# Altium PCB Lora_Eval_Module.PcbDoc
Units mil, origin at the board's own origin, x right, y up, seen from the top; angles counter-clockwise.
Board outline 1180.05 x 1532.38 mil, 2 copper layers (Top Layer, Bottom Layer); 7 components, 15 nets, 49 pads, 74 vias.
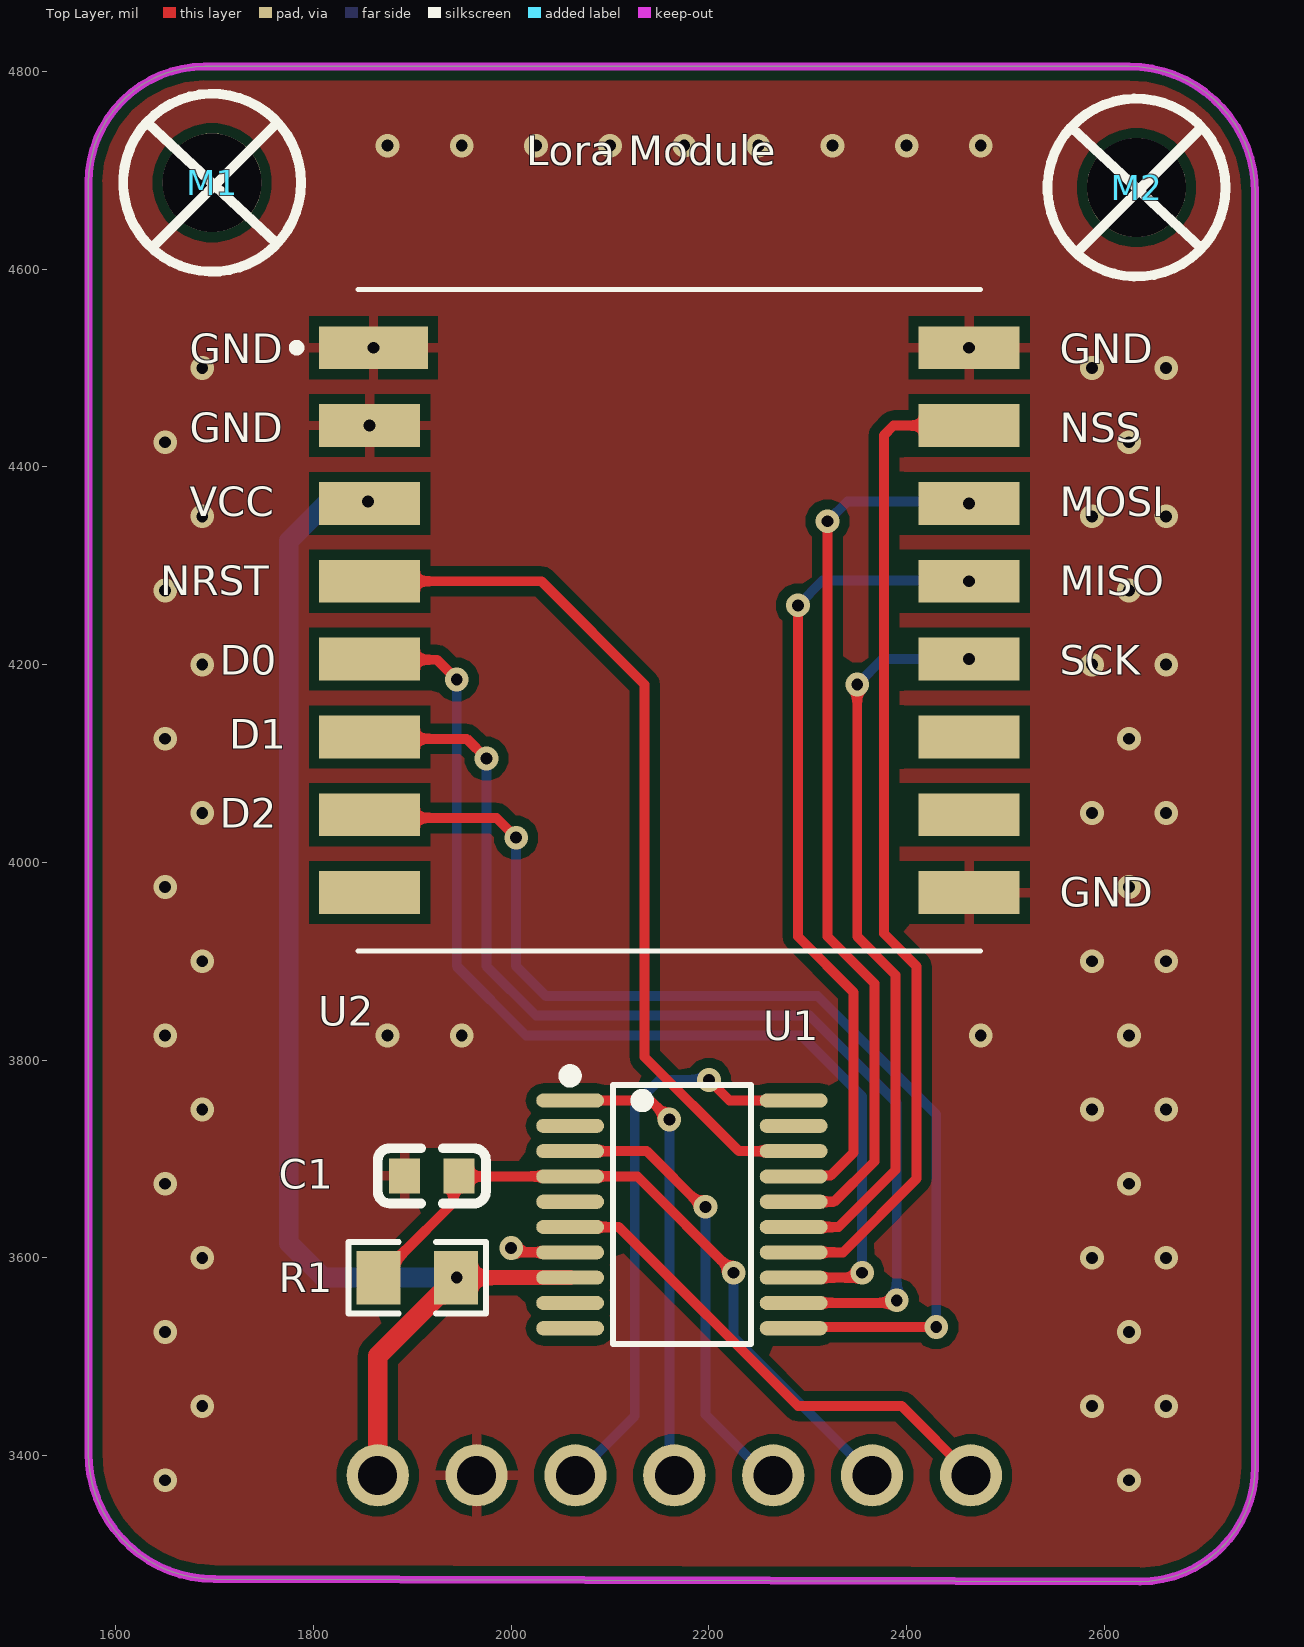
[diagram p0: Top Layer view]
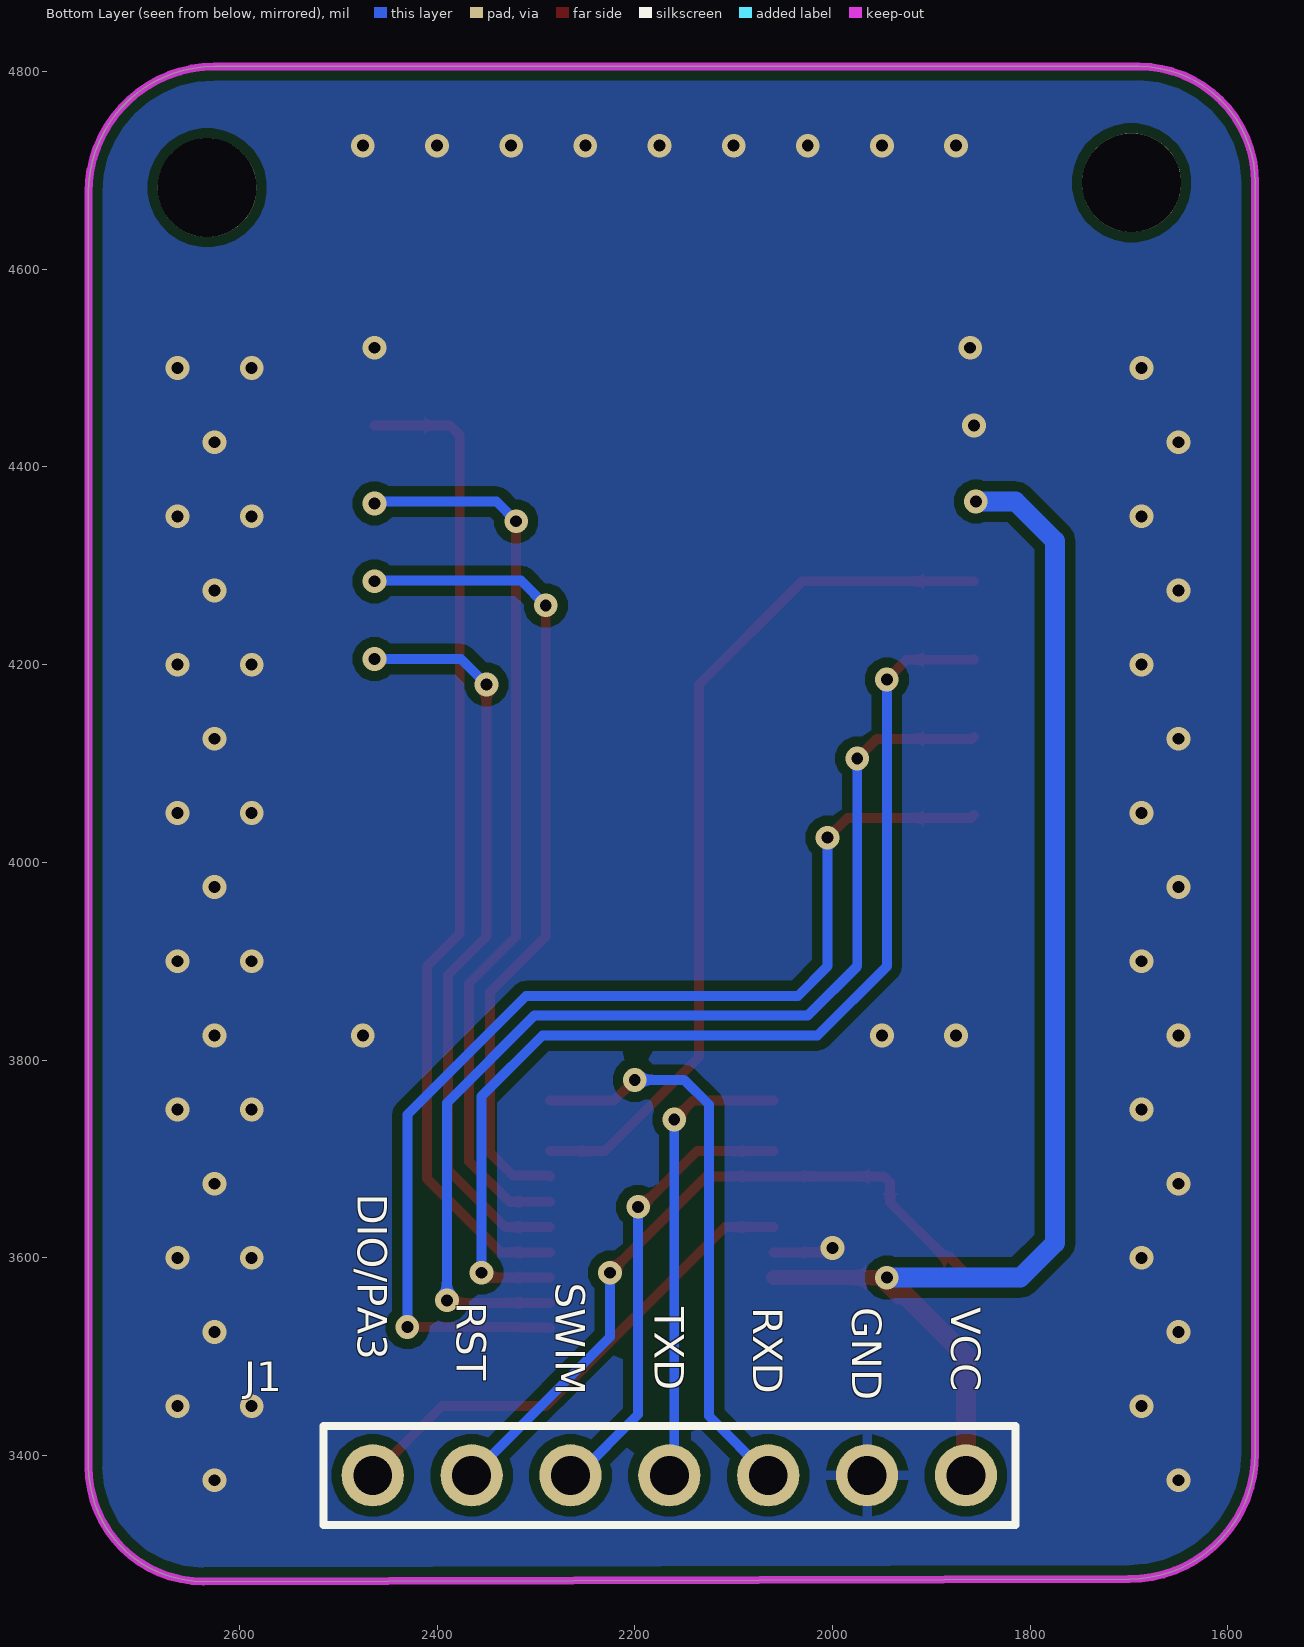
[diagram p1: Bottom Layer view, seen from below]
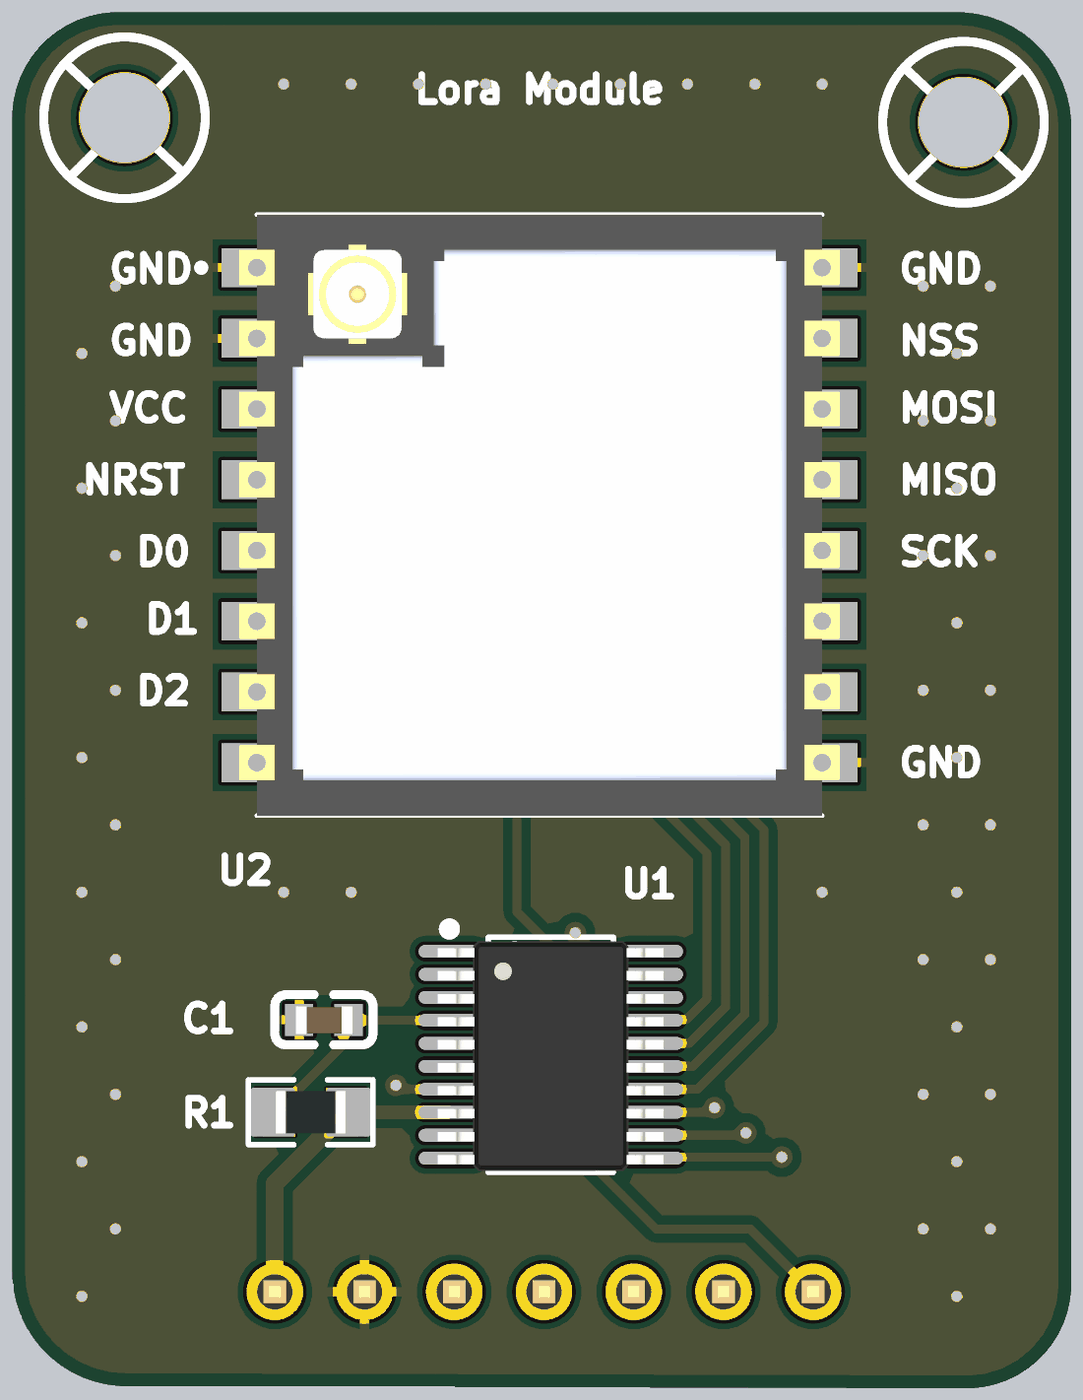
[diagram p2: 3D render of the assembled board from above, using the file's embedded part models]

## Layer stack, top to bottom
Top Solder: solder mask 0.4, Solder Resist, Dk 3.5
Top Layer: signal copper 1.4
Dielectric 1: dielectric 12.6, FR-4, Dk 4.8
Bottom Layer: signal copper 1.4
Bottom Solder: solder mask 0.4, Solder Resist, Dk 3.5

## Board outline
1700.01,3275 cw(c1700.01,3402.53) 1572.48,3402.53 1572.48,4687.5 cw(c1690,4687.5) 1690,4805.03 2625,4805.03 cw(c2625,4677.5) 2752.52,4677.5 2752.52,3389.12 cw(c2636.05,3389.12) 2636.05,3272.65

## Design rules (kind name [scope] priority, off if disabled: settings)
Clearance [All] p1: gap=10 ignorepadtopadclearanceinfootprint=FALSE except(0: Arc-Hole Track-Hole SMDPad-Hole THPad-Hole Via-Hole Fill-Hole Poly-Hole Region-Hole Text-Hole)
PolygonConnect PolygonConnect_Via [IsVia] p1: connectstyle=Direct reliefconductorwidth=10 reliefentries=4 polygonreliefangle="90 Angle" airgapwidth=10
PolygonConnect PolygonConnect_Pad [All] p2: connectstyle=Relief reliefconductorwidth=10 reliefentries=4 polygonreliefangle="90 Angle" airgapwidth=10
RoutingVias [All] p1: holewidth=28 width=50 viastyle="Through Hole" minholewidth=28 minwidth=50 maxholewidth=28 maxwidth=50
SolderMaskExpansion [All] p1: expansion=4 istentingtop=FALSE
Width GND [InNet('GND')] p1: maxlimit=40 minlimit=10 preferedwidth=20 minimp=50.000000 maximp=50.000000 favimp=50.000000
Width VCC [InNet('VCC')] p2: maxlimit=40 minlimit=10 preferedwidth=20 minimp=50.000000 maximp=50.000000 favimp=50.000000
Width Routing [All] p3: maxlimit=50 minlimit=10 preferedwidth=20 minimp=50.000000 maximp=50.000000 favimp=50.000000
30 further rules are at their usual default settings.

## Components (designator, comment, footprint, x,y, rotation, side; value= is the part's Value field where it differs from the comment)
C1 "100nF" C0603 1920,3685 r0 top
J1 "PinHeader_7Pin" PinHeader_7Pin-2.54mm 2165,3380 r0 bottom
M1 "PCB Mounting Hole" "PCB Mounting Hole" 1700,4685 r0 top
M2 "PCB Mounting Hole" "PCB Mounting Hole" 2635,4680 r0 top
R1 "10KΩ" R0805 1905,3580 r0 top
U1 "STM8L101" TSSOP-20_4.4x6.5mm_P0.65mm 2175,3645 r270 top
U2 "SX1278" "SX1278_Ra-02-Lora Module_Ai Thinker" 2165,4240 r0 top

## Footprints (in the part's own frame and the unit in brackets; to place one, negate y for a bottom-side part, rotate by r counter-clockwise, add the part's x,y. Pads: shape width x height; smd on the part's side, far side on the other; paste and mask are expansions set on the pad)
C0603 [mm]
  rect 0.8x0.9 smd: 1(-0.707,-0.052) 2(0.693,-0.052)
  silkscreen extent -1.4,-0.76 1.38,0.66, body extent -0.8,-0.46 0.8,0.34, height 0.8
"PCB Mounting Hole" [mil]
  round 100 hole 100 paste-99999 mask+4: 1(-2.5,2.5)
  silkscreen extent -92,-87 88,92
PinHeader_7Pin-2.54mm [mm]
  round 1.6 hole 1: 1(-7.62,0) 2(-5.08,0) 3(-2.54,0) 4(0,0) 5(2.54,0) 6(5.08,0) 7(7.62,0)
  silkscreen extent -8.89,-1.27 8.89,1.27, body extent -8.89,-1.27 8.89,1.27, height 8.54
R0805 [mm]
  rect 1.133x1.377 smd paste-100 mask+0.051: 1(-1,0) 2(1,0)
  silkscreen extent -1.76,-0.92 1.76,0.92, body extent -1,-0.6 1,0.6, height 0.45
"SX1278_Ra-02-Lora Module_Ai Thinker" [mm] "Footprint from Manufacturer"
  rect 2.8x1.1 smd: 1(-7.727,7.127)
  rect 2.6x1.1 smd: 2(-7.827,5.127) 3(-7.827,3.127) 4(-7.827,1.127) 5(-7.827,-0.873) 6(-7.827,-2.873) 7(-7.827,-4.873) 8(-7.827,-6.873) 9(7.573,-6.873) 10(7.573,-4.873) 11(7.573,-2.873) 12(7.573,-0.873) 13(7.573,1.127) 14(7.573,3.127) 15(7.573,5.127) 16(7.573,7.127)
  silkscreen extent -9.8,-8.37 7.87,8.63, body extent -8.63,-8.37 8.37,8.63, height 3.3
TSSOP-20_4.4x6.5mm_P0.65mm [mil]
  oval 14.33x68.58 smd: 1(-114.12,-115.39) 2(-88.53,-115.39) 3(-62.94,-115.39) 4(-37.35,-115.39) 5(-11.75,-115.39) 6(13.84,-115.39) 7(39.43,-115.39) 8(65.02,-115.39) 9(90.61,-115.39) 10(116.2,-115.39) 11(116.2,110.67) 12(90.61,110.67) 13(65.02,110.67) 14(39.43,110.67) 15(13.84,110.67) 16(-11.75,110.67) 17(-37.35,110.67) 18(-62.94,110.67) 19(-88.53,110.67) 20(-114.12,110.67)
  silkscreen extent -145,-121 132,67, body extent -125,-128 130,123, height 47

## Part data
C1: library part Capacitor_0603
M1 M2: "Mounting Hole"
R1: library part Resistor_0805
U1: library part STM8L101_TSSOP-20, "4.4x6.5mm_P0.65mm"
U2: library part "SX1278_Ra-02-Lora Module_Ai Thinker", "Footprint from Manufacturer"

## Via types
v1: diameter 24, hole 12, Top Layer to Bottom Layer, tented both sides, 74 vias

## Nets (pads, with @x,y where several pads share a name; then routed paths per layer and width w, separated by ;. In a path a pad name is that pad's centre, name@x,y a point inside that pad or via, vN(x,y) a via of type N, cw(c..) or ccw(c..) an arc to the next point about the centre after c; other vN are vias at no path point)
D0: U1.13 U2.5 | length 1101
  Top Layer w10: U2.5 1857.48,4205 1925,4205 v1(1945,4185) ; U1.13 2346.19,3579.98 2351.21,3585 v1(2355,3585)
  Bottom Layer w10: v1(1945,4185) 1945,3895 2015,3825 2293.43,3825 2355,3763.43 v1(2355,3585)
D1: U1.12 U2.6 | length 1114.6
  Top Layer w10: U2.6 1858.74,4125 1955,4125 v1(1975,4105) ; U1.12 2387.39,3554.39 v1(2390,3557)
  Bottom Layer w10: v1(1975,4105) 1975,3895 2025,3845 2301.72,3845 2390,3756.72 v1(2390,3557)
D2: U1.11 U2.7 | length 1134.7
  Top Layer w10: U2.7 1860,4045 1985,4045 v1(2005,4025) ; U1.11 2286.5,3529.63 2316.69,3529.63 2317.06,3530 v1(2430,3530)
  Bottom Layer w10: v1(2005,4025) 2005,3895 2035,3865 2310,3865 2430,3745 v1(2430,3530)
DIO/PA3: J1.7 U1.6 | length 509.4
  Top Layer w10: U1.6 2108.84,3631.16 2290,3450 2395,3450 J1.7
GND: C1.1 J1.2 U1.7 U2.1 U2.2 U2.9 U2.16 | length 61.4
  Top Layer w10: v1(2000,3610) 2003.79,3610 2008.22,3605.57 U1.7
  other v1: 1650,3375 2625,3375 1687.5,3450 2587.5,3450 2662.5,3450 1650,3525 2625,3525 1687.5,3600 2587.5,3600 2662.5,3600 1650,3675 2625,3675 1687.5,3750 2587.5,3750 2662.5,3750 1650,3825 1875,3825 1950,3825 2475,3825 2625,3825 1687.5,3900 2587.5,3900 2662.5,3900 1650,3975 2625,3975 1687.5,4050 2587.5,4050 2662.5,4050 1650,4125 2625,4125 1687.5,4200 2587.5,4200 2662.5,4200 1650,4275 2625,4275 1687.5,4350 2587.5,4350 2662.5,4350 1650,4425 2625,4425 1856.85,4441.85 1687.5,4500 2587.5,4500 2662.5,4500 1860.79,4520.59 2463.15,4520.59 1875,4725 1950,4725 2025,4725 2100,4725 2175,4725 2250,4725 2325,4725 2400,4725 2475,4725
Lora_NRST: U1.18 U2.4 | length 888.3
  Top Layer w10: U2.4 2030.63,4284.37 2135,4180 2135,3803.18 2230.24,3707.94 U1.18
MISO: U1.17 U2.13 | length 831.4
  Top Layer w10: U1.17 2286.5,3683.18 2323.18,3683.18 2346.36,3706.36 2346.36,3868.64 2290,3925 v1(2290,4260)
  Bottom Layer w10: v1(2290,4260) 2315,4285 2462.52,4285 v1(2463.15,4284.37)
MOSI: U1.16 U2.14 | length 918.2
  Top Layer w10: U1.16 2326.75,3656.75 2367.57,3697.57 2367.57,3877.43 2320,3925 v1(2320,4345)
  Bottom Layer w10: v1(2320,4345) 2340,4365 2461.26,4365 v1(2463.15,4363.11)
NSS: U1.14 U2.15 | length 1011.1
  Top Layer w10: U1.14 2335.57,3605.57 2410,3680 2410,3895 2377,3928 2377,4432 2386.85,4441.85 U2.15
RST: C1.2 J1.6 R1.1 U1.4 | length 719.7
  Top Layer w10: R1.1 1865.63,3584.81 1882.92,3602.11 1887.74,3602.11 1941.73,3656.1 1941.73,3676.19 1947.88,3682.35 U1.4 2127.65,3682.35 v1(2225,3585)
  Bottom Layer w10: v1(2225,3585) 2225,3520 J1.6
RXD: J1.3 U1.20 | length 579.5
  Top Layer w10: v1(2200,3780) 2220.88,3759.12 U1.20
  Bottom Layer w10: J1.3 2125,3440 2125,3755 2150,3780 v1(2200,3780)
SCK: U1.15 U2.12 | length 758
  Top Layer w10: U1.15 2331.16,3631.16 2388.79,3688.79 2388.79,3886.21 2350,3925 v1(2350,4180)
  Bottom Layer w10: v1(2350,4180) 2375.63,4205.63 v1(2463.15,4205.63)
SWIM: J1.5 U1.3 | length 464.2
  Top Layer w10: U1.3 2137.06,3707.94 2193.41,3651.59 v1(2196.59,3651.59)
  Bottom Layer w10: v1(2196.59,3651.59) 2196.59,3441.59 2258.18,3380 J1.5
TXD: J1.4 U1.1 | length 468.3
  Top Layer w10: U1.1 2140.88,3759.12 v1(2160,3740)
  Bottom Layer w10: J1.4@2160,3380 v1(2160,3740)
VCC: J1.1 R1.2 U1.8 U2.3 | length 1345.6
  Top Layer w10: R1.2@1945,3575.82 v1(1945,3580)
  Top Layer w15: v1(1945,3580) U1.8
  Top Layer w20: J1.1 1865,3500.63 1927.26,3562.89 1932.08,3562.89 1944.37,3575.19 R1.2
  Bottom Layer w20: v1(1855,4365) 1815,4365 1775,4325 1775,3615 1810,3580 v1(1945,3580)
pads on no net: M1.1 M2.1 U1.2 U1.5 U1.9 U1.10 U1.19 U2.8 U2.10 U2.11

## Polygon pours and split planes (outlines as drawn)
GND on Bottom Layer "NONET_L01_P-001" (solid, remove dead copper, pour order 1): 1555,4815 2770,4815 2775,4810 2765,4800 2765,3260 1555,3260
GND on Top Layer "NONET_L01_P-001" (solid, remove dead copper, pour order 0): 1555,4815 1560,4810 2770,4810 2770,3300 2735,3265 2730,3270 1555,3270

## Keep-outs
Keep-Out Layer:
  the board outline again, w8

## Silkscreen, mask and mechanical layers (free items; w line width, h text height)
Top Overlay:
  text "Lora Module" at 2015,4705 h30
  text "GND" at 1675,4505 h30
  text "GND" at 2555,4505 h30
  text "GND" at 1675,4425 h30
  text "NSS" at 2555,4425 h30
  text "VCC" at 1675,4350 h30
  text "MOSI" at 2555,4350 h30
  text "NRST" at 1645,4270 h30
  text "MISO" at 2555,4270 h30
  text "D0" at 1705,4190 h30
  text "SCK" at 2555,4190 h30
  text "D1" at 1715,4115 h30
  text "D2" at 1705,4035 h30
  text "GND" at 2555,3955 h30
Bottom Overlay:
  text "DIO/PA3" at 2480,3665 h30 r90
  text "SWIM" at 2280,3575 h30 r90
  text "RST" at 2380,3555 h30 r90
  text "VCC" at 1880,3550 h30 r90
  text "GND" at 1980,3550 h30 r90
  text "RXD" at 2080,3550 h30 r90
  text "TXD" at 2180,3550 h30 r90